# Altium PCB PCB2.PcbDoc (part 1 of 2)
Units mm, origin at the board's own origin, x right, y up, seen from the top; angles counter-clockwise.
Board outline 99.5 x 79.18 mm, 4 copper layers (Top Layer, Int1 (GND), Int2 (PWR), Bottom Layer), stack 1.317 mm thick; 113 components, 127 nets, 520 pads, 144 vias.
Unrouted connection lines stored in the file: 1.
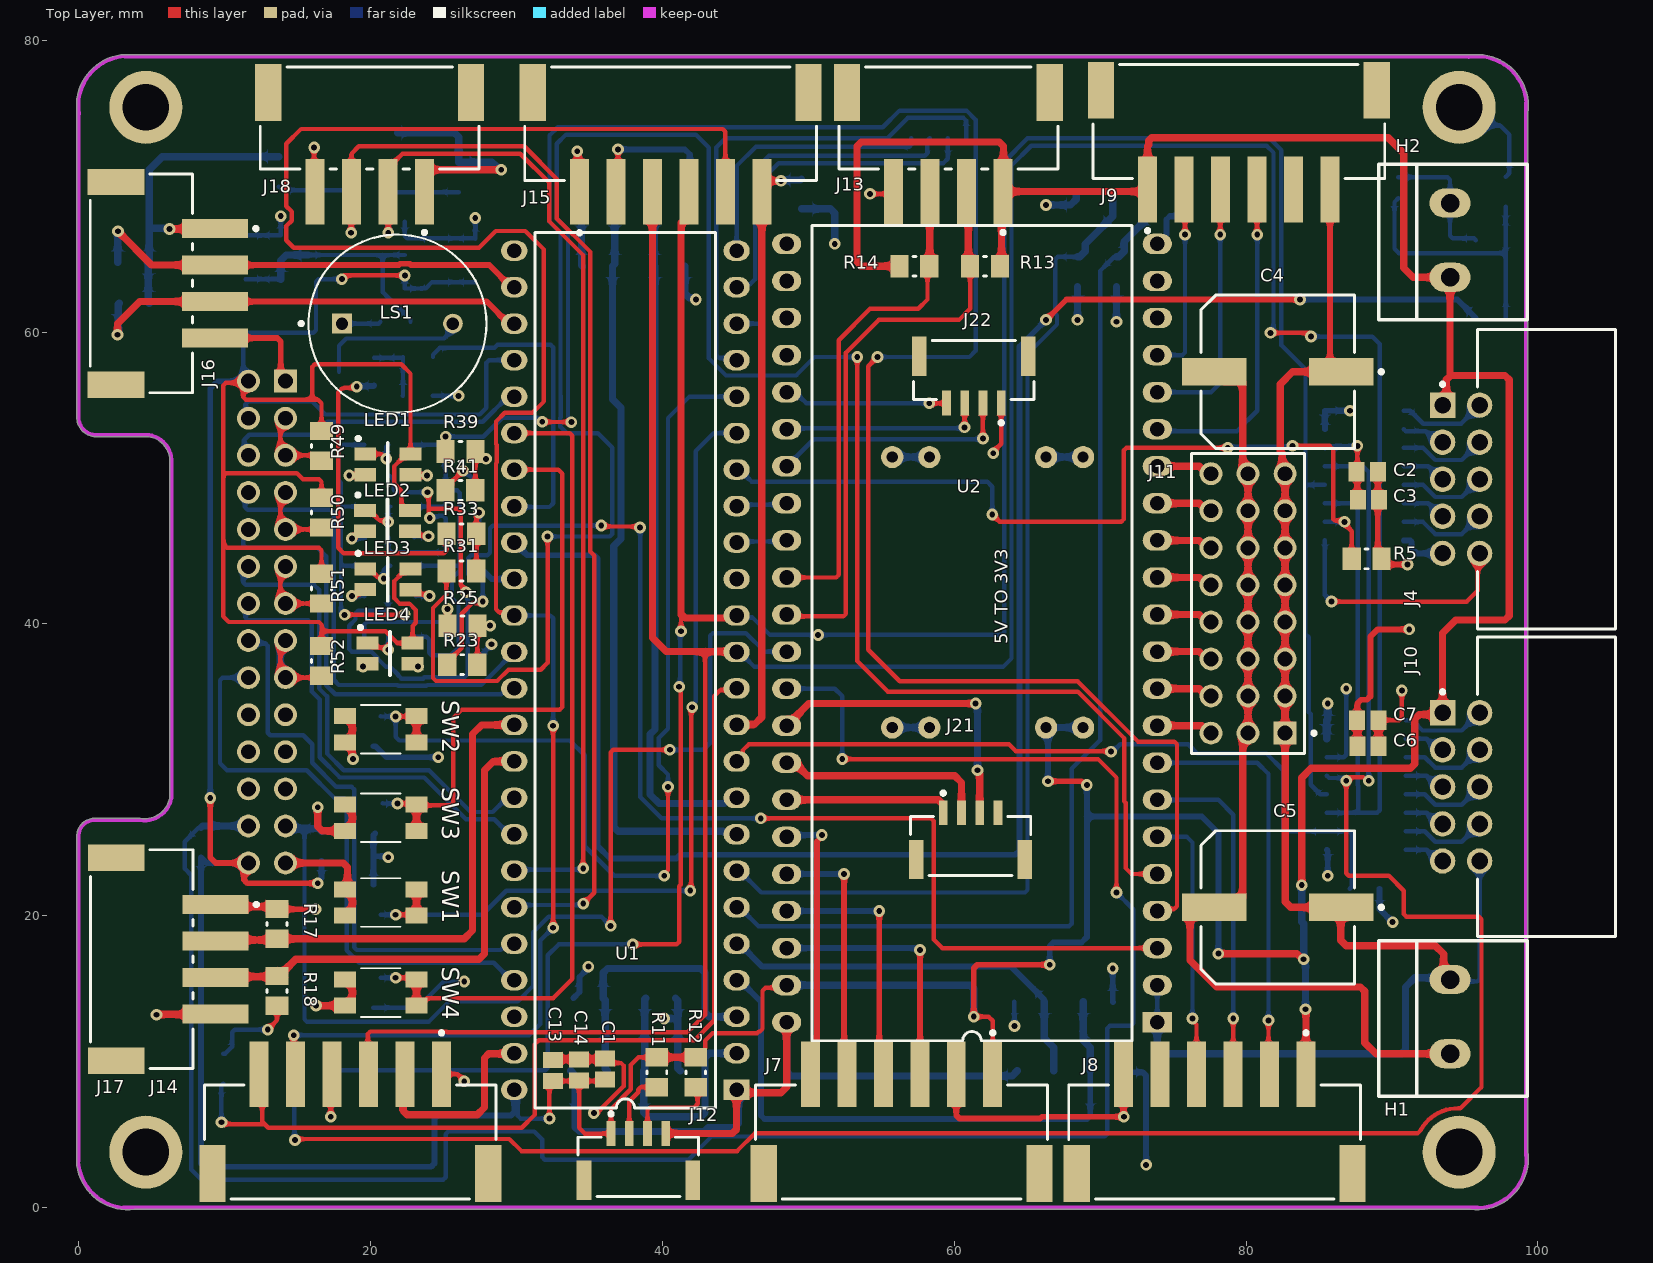
[diagram p0: Top Layer view]
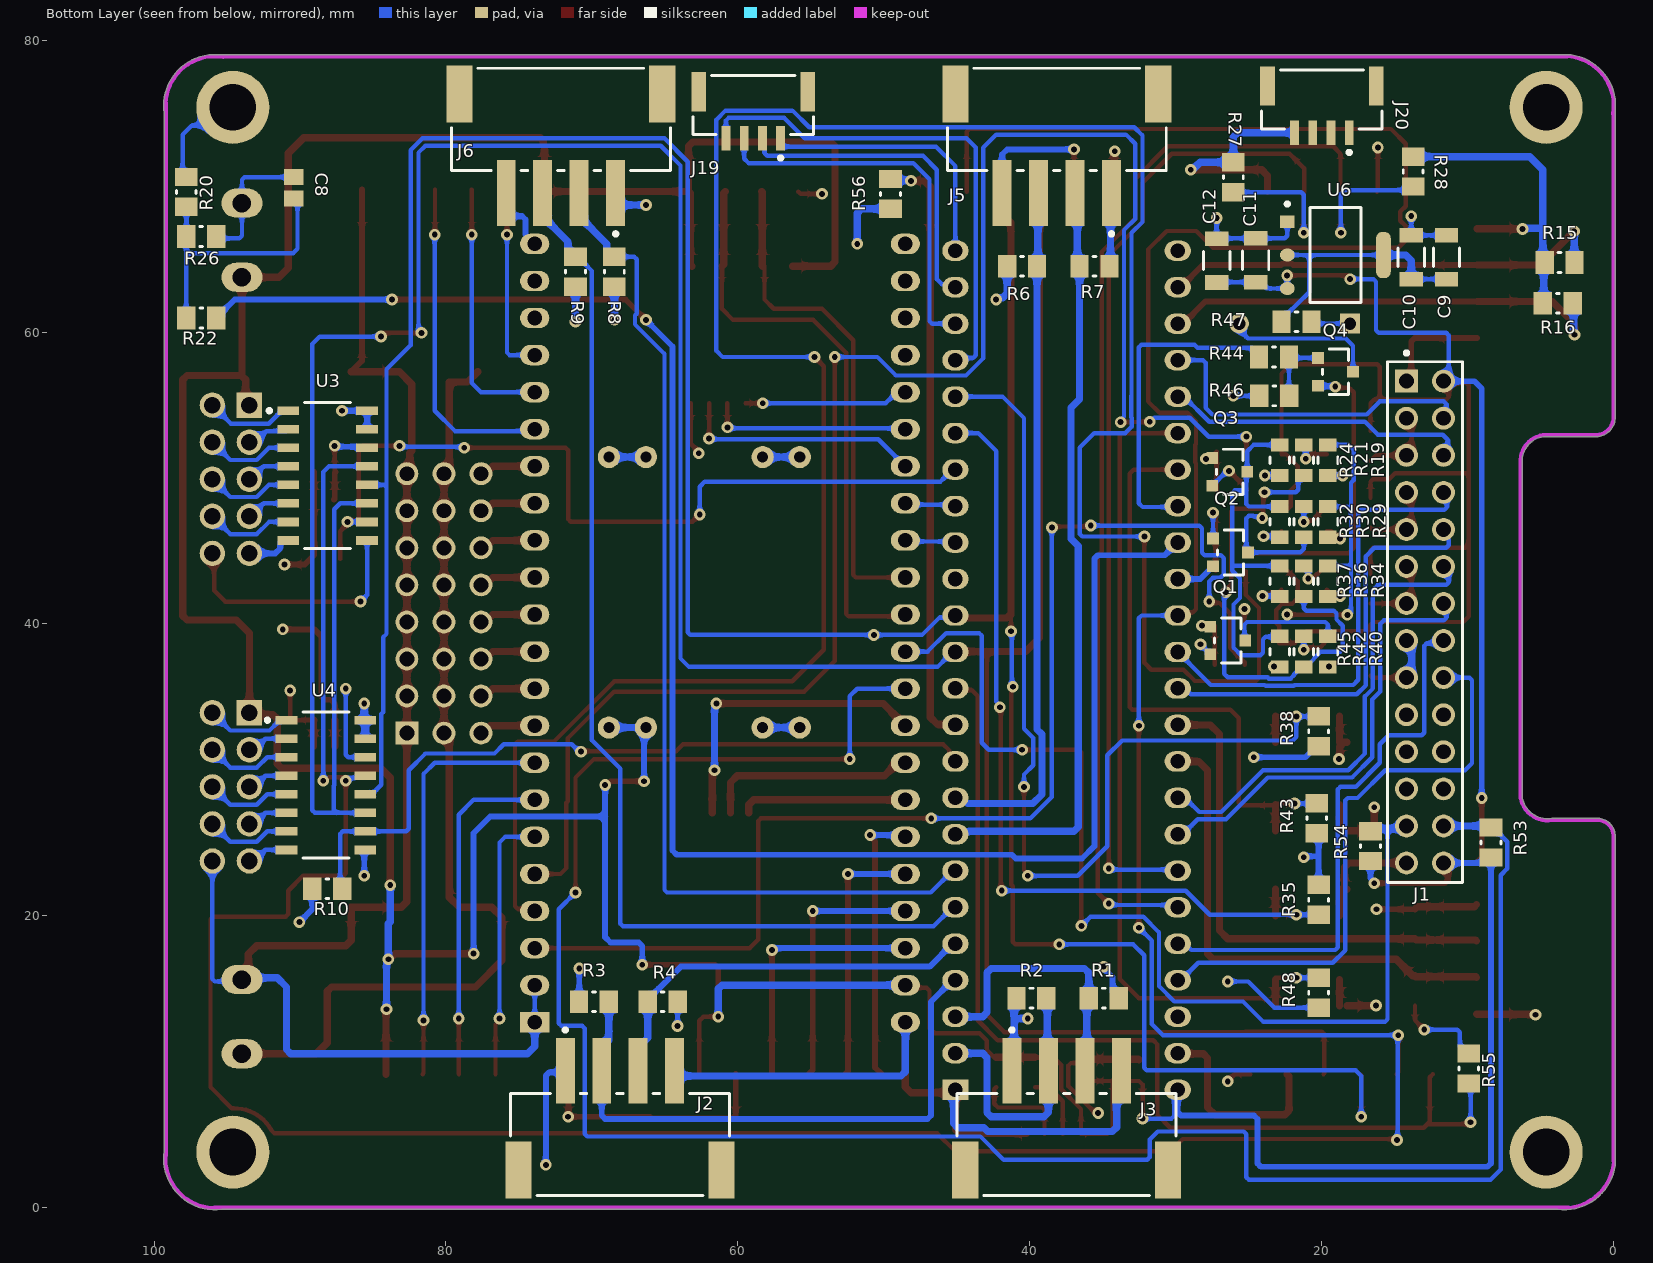
[diagram p1: Bottom Layer view, seen from below]
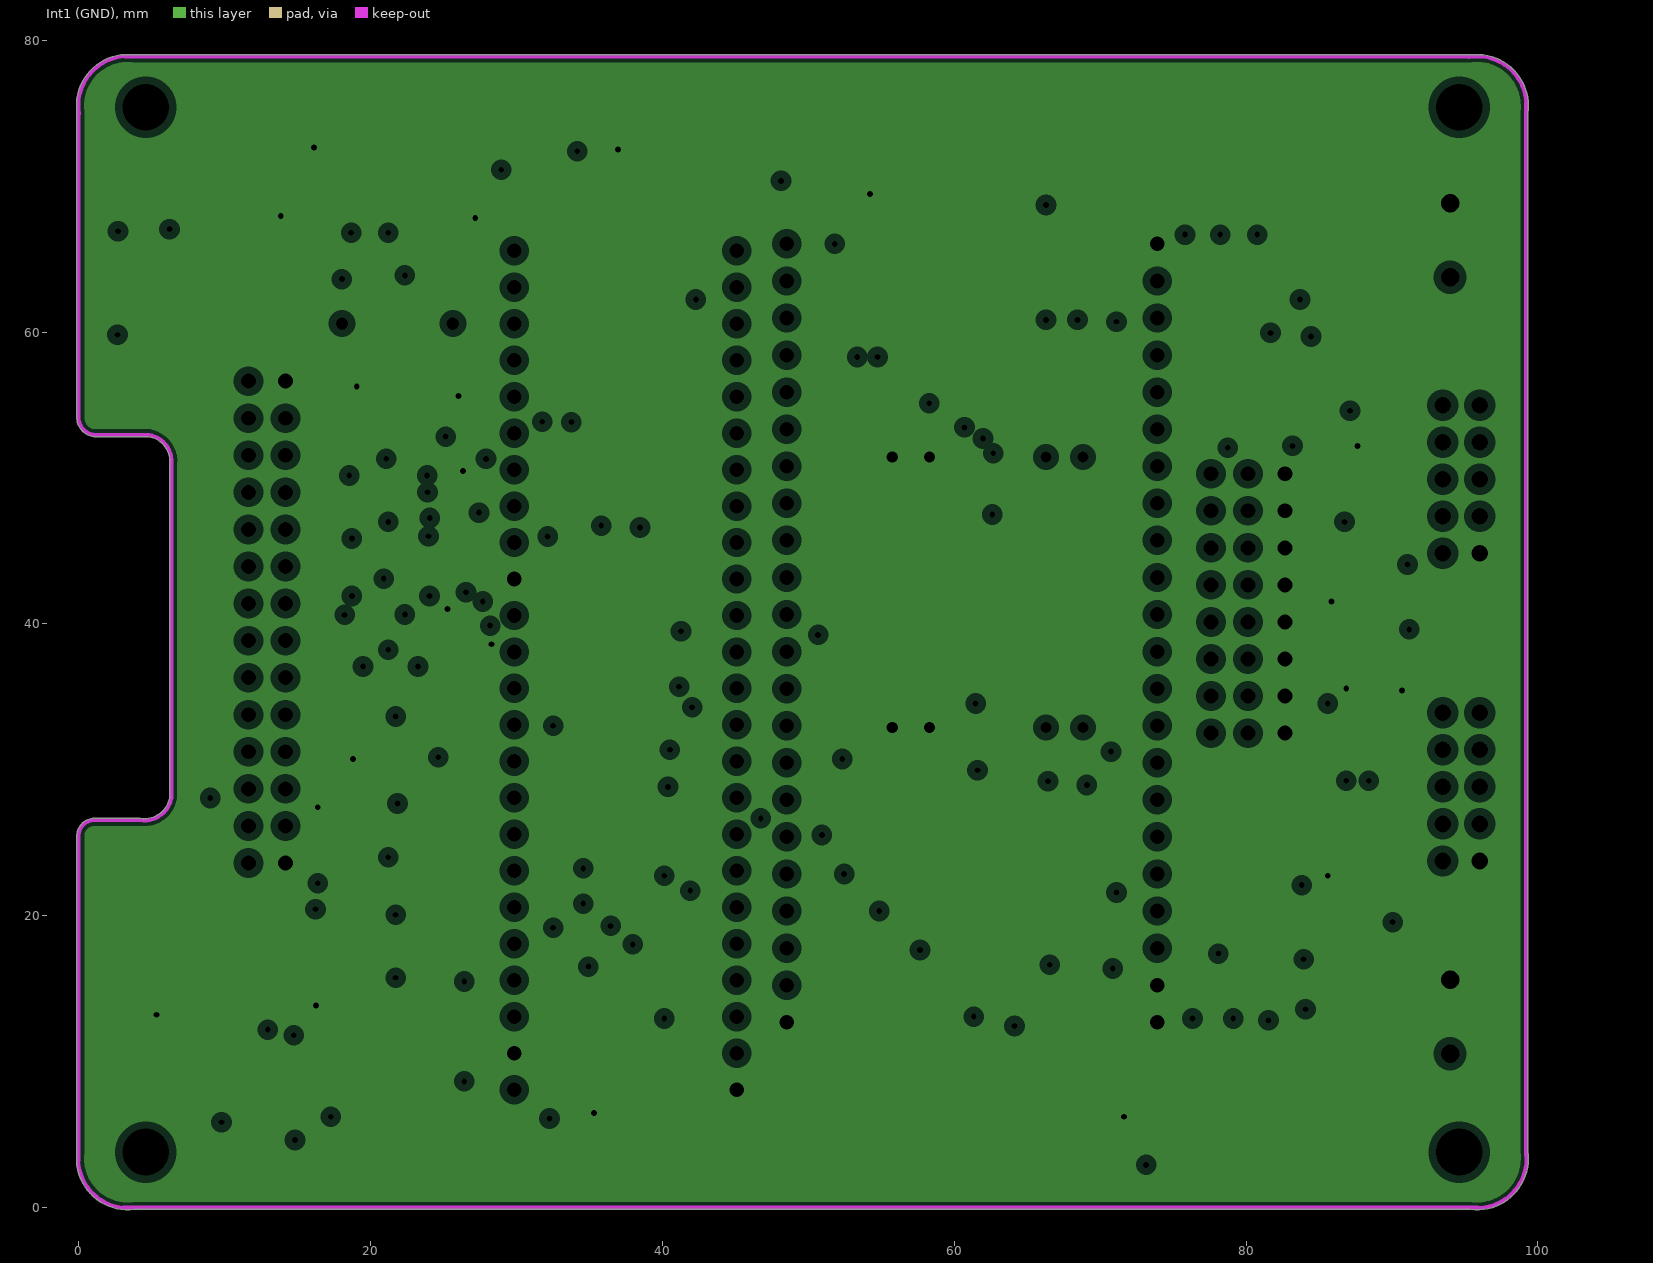
[diagram p2: Int1 (GND), clearances drawn from the general rule]
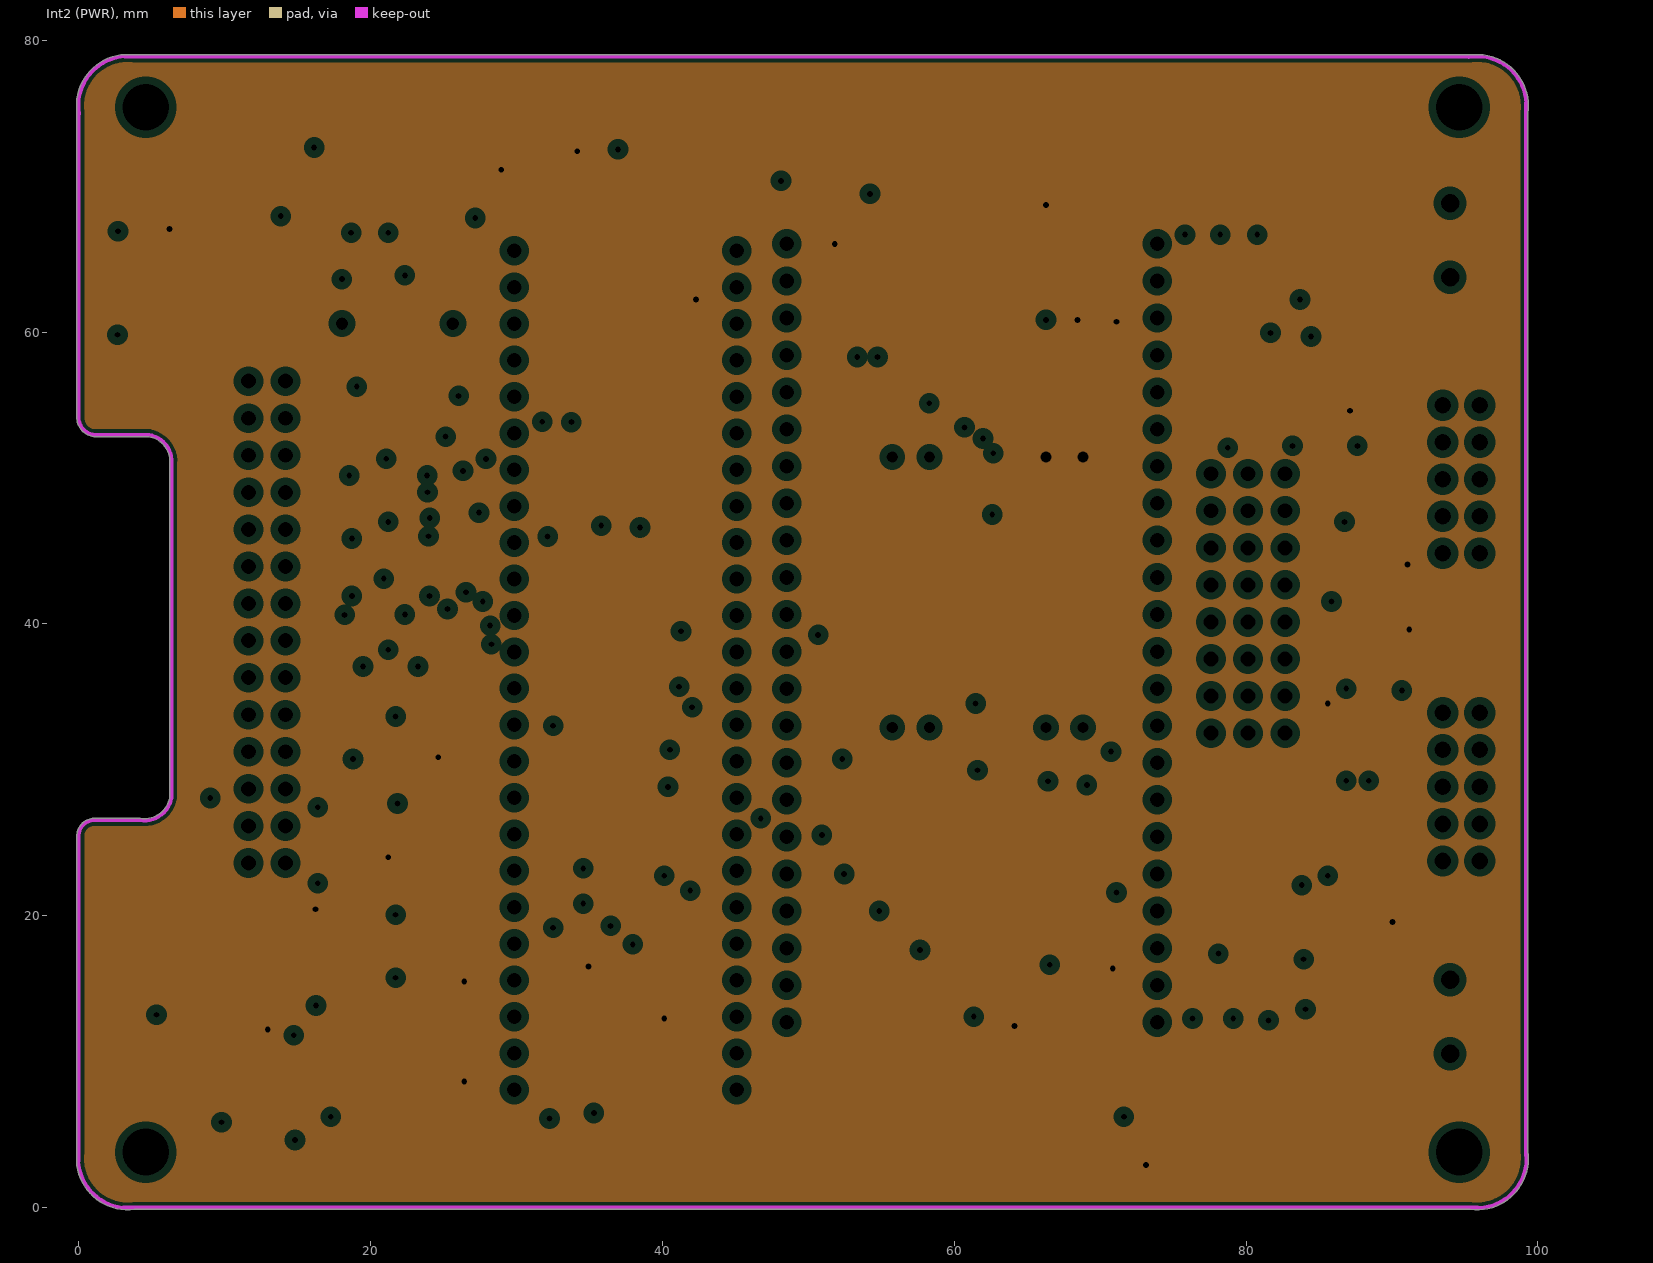
[diagram p3: Int2 (PWR), clearances drawn from the general rule]
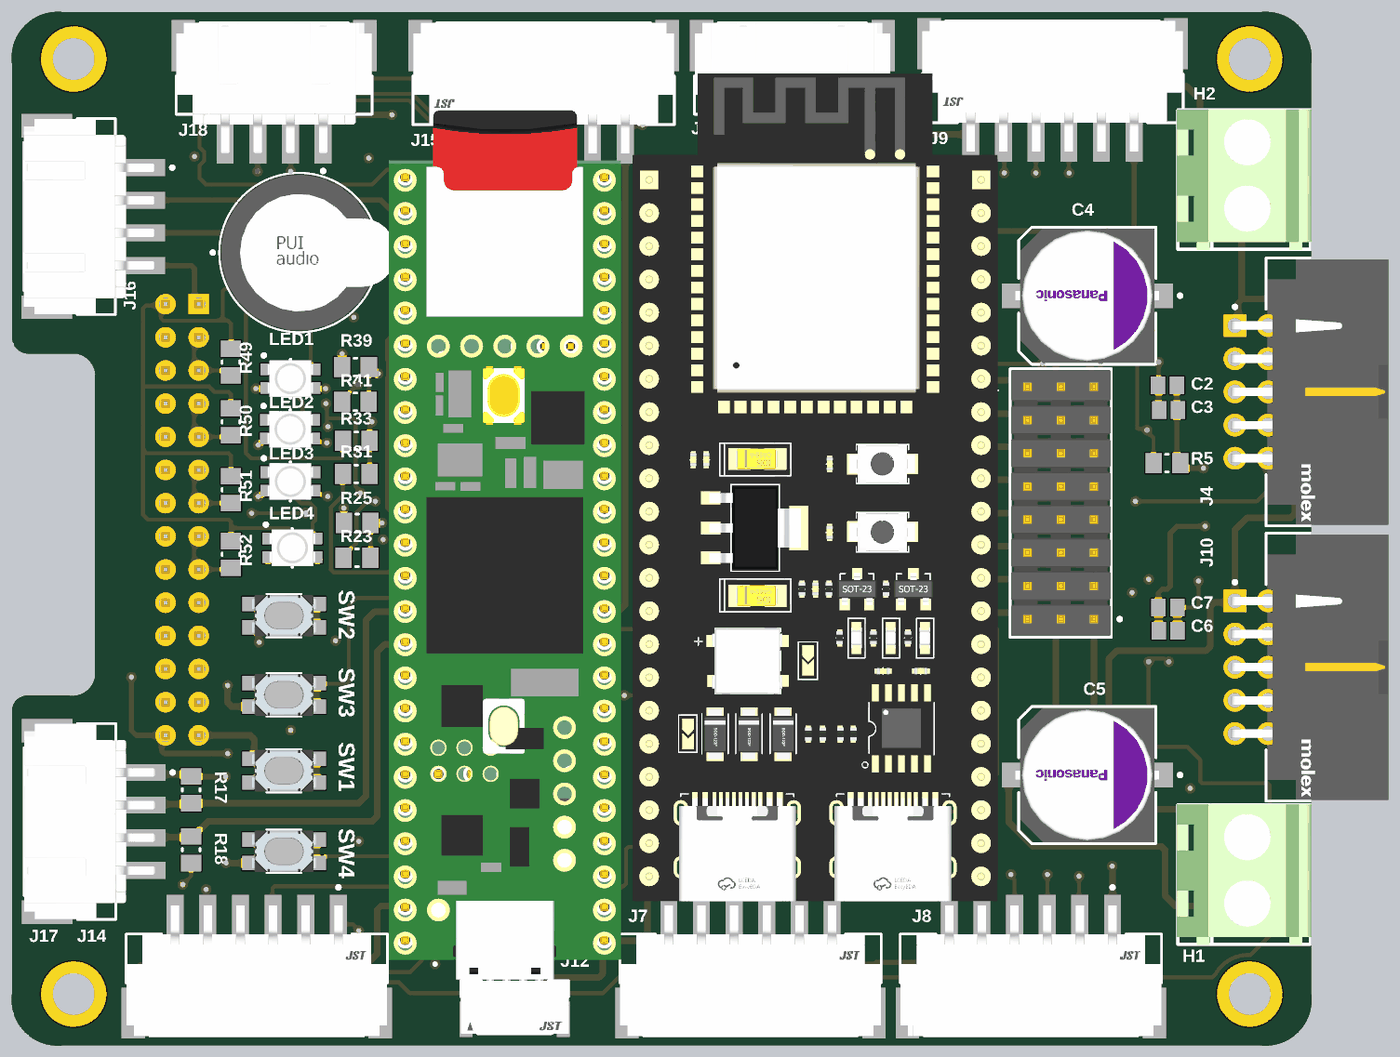
[diagram p5: 3D render of the assembled board from above, using the file's embedded part models]
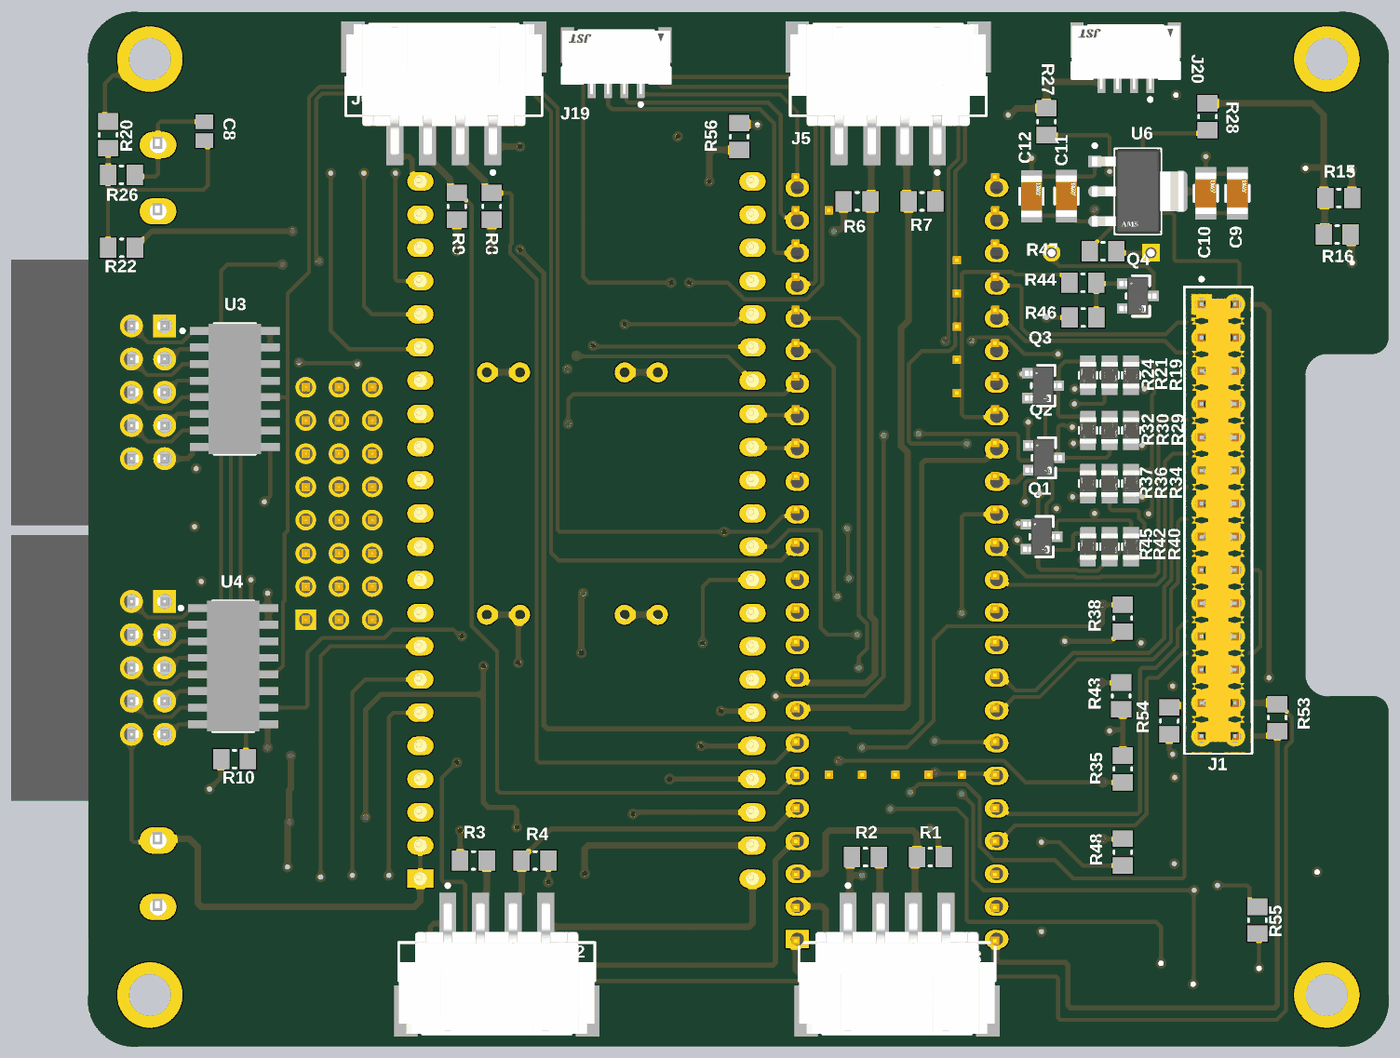
[diagram p6: 3D render of the assembled board from below, using the file's embedded part models]

## Layer stack, top to bottom
Top Solder: solder mask 0.0254, SM-001, Dk 4
Top Layer: signal copper 0.035
Dielectric 1: prepreg 0.1295, PP-017, Dk 4.3
Dielectric 2: prepreg 0.1295, PP-017, Dk 4.3
Int1 (GND): plane copper 0.009, net GND
Dielectric 3: core 0.7112, Core-039, Dk 4.8
Int2 (PWR): plane copper 0.009, net 3.3
Dielectric 4: prepreg 0.1295, PP-017, Dk 4.3
Dielectric 5: prepreg 0.1295, PP-017, Dk 4.3
Bottom Layer: signal copper 0.035
Bottom Solder: solder mask 0.0254, SM-001, Dk 4

## Board outline
-0.127,3.818 -0.127,25.527 -0.127,25.534 cw(c1.079,25.463) 1.147,26.67 4.191,26.67 4.213,26.668 ccw(c4.508,28.384) 6.223,28.078 6.223,51.181 6.245,51.252 ccw(c4.508,51.117) 4.815,52.832 1.143,52.832 1.14,52.832 cw(c1.175,54.134) -0.127,54.167 -0.127,75.049 cw(c3.365,75.501) 3.818,78.994 95.369,78.994 cw(c95.822,75.501) 99.344,75.501 cw(c95.822,75.501) 99.314,75.049 99.314,3.818 cw(c95.822,3.365) 99.344,3.365 cw(c95.822,3.365) 95.369,-0.127 3.818,-0.127 cw(c3.365,3.365)

## Design rules (kind name [scope] priority, off if disabled: settings)
Clearance [All] p1: gap=0.2 ignorepadtopadclearanceinfootprint=FALSE
PlaneClearance [All] p1: clearance=0.508
PlaneConnect [All] p1: planeconnectstyle=Relief reliefexpansion=0.508 reliefentries=4 reliefconductorwidth=0.254 reliefairgap=0.254
PolygonConnect [All] p1: connectstyle=Relief reliefconductorwidth=0.254 reliefentries=4 polygonreliefangle="90 Angle" airgapwidth=0.254
RoutingVias [All] p1: holewidth=0.5 width=1 viastyle="Through Hole" minholewidth=0.3 minwidth=0.6 maxholewidth=0.4 maxwidth=0.8
SolderMaskExpansion [All] p1: expansion=0.102 istentingtop=FALSE
Width POWER [All] p1: maxlimit=0.5 minlimit=0.3 preferedwidth=0.4
Width SIGNAL [InNetClass('SIGNAL')] p2: maxlimit=0.4 minlimit=0.2 preferedwidth=0.3 minimp=50.000000 maximp=50.000000 favimp=50.000000
Width [All] p3: maxlimit=0.254 minlimit=0.254 preferedwidth=0.254
28 further rules are at their usual default settings.

## Components (designator, comment, footprint, x,y, rotation, side; value= is the part's Value field where it differs from the comment)
"5V TO 3V3" "MP1584" MP1584 66.293,32.893 r90 top (schematic designator ?)
C1 "VJ0805Y104MXAMT" CAPC2013X145X48LL20T23 36.068,9.488 r270 top
C2 "VJ0805Y104MXAMT" CAPC2013X145X48LL20T23 88.302,50.419 r0 top
C3 "VJ0805Y104MXAMT" CAPC2013X145X48LL20T23 88.392,48.514 r0 top
C4 "100SXV15MX" FP-OS-CON-SMT-F8-MFG 82.169,57.277 r180 top
C5 "100SXV15MX" FP-OS-CON-SMT-F8-MFG 82.169,20.574 r180 top
C6 "VJ0805Y104MXAMT" CAPC2013X145X48LL20T23 88.355,31.623 r180 top
C7 "VJ0805Y104MXAMT" CAPC2013X145X48LL20T23 88.342,33.401 r180 top
C8 "VJ0805Y104MXAMT" CAPC2013X145X48LL20T23 90.424,69.887 r270 bottom
C9 "12061A101JAT2A" FP-1206-L_3_2_0_2-W_1_6_0-MFG 11.43,65.127 r90 bottom
C10 "12061A101JAT2A" FP-1206-L_3_2_0_2-W_1_6_0-MFG 13.843,65.127 r90 bottom
C11 "12061A101JAT2A" FP-1206-L_3_2_0_2-W_1_6_0-MFG 24.511,64.921 r90 bottom
C12 "12061A101JAT2A" FP-1206-L_3_2_0_2-W_1_6_0-MFG 27.178,64.897 r90 bottom
C13 "VJ0805Y104MXAMT" CAPC2013X145X48LL20T23 32.498,9.398 r270 top
C14 "VJ0805Y104MXAMT" CAPC2013X145X48LL20T23 34.29,9.435 r270 top
H1 "2P" KF128-2P 89.027,18.288 r270 top
H2 "2P" KF128-2P 89.027,71.501 r270 top
J1 "HTSW-114-17-L-D" FP-HTSW-114-17-L-D-MFG 12.9,40.123 r270 bottom
J2 "S4B-XH-SM4-TB(LF)(SN)" FP-S4B-XH-SM4-TB_LF_SN-MFG 68.072,4.318 r180 bottom
J3 "S4B-XH-SM4-TB(LF)(SN)" FP-S4B-XH-SM4-TB_LF_SN-MFG 37.465,4.318 r180 bottom
J4 "70247-1054" FP-70247-1054-MFG 100.584,49.911 r90 top
J5 "S4B-XH-SM4-TB(LF)(SN)" FP-S4B-XH-SM4-TB_LF_SN-MFG 38.135,74.577 r0 bottom
J6 "S4B-XH-SM4-TB(LF)(SN)" FP-S4B-XH-SM4-TB_LF_SN-MFG 72.117,74.577 r0 bottom
J7 "S6B-XH-SM4-TB(LF)(SN)" FP-S6B-XH-SM4-TB_LF_SN-MFG 56.388,4.494 r0 top
J8 "S6B-XH-SM4-TB(LF)(SN)" FP-S6B-XH-SM4-TB_LF_SN-MFG 77.851,4.494 r0 top
J9 "S6B-XH-SM4-TB(LF)(SN)" FP-S6B-XH-SM4-TB_LF_SN-MFG 79.502,74.422 r180 top
J10 "70247-1054" FP-70247-1054-MFG 100.584,28.829 r90 top
J11 "TSW-108-07-G-T" FP-TSW-108-07-G-T-MFG 80.137,41.402 r90 top
J12 "SM04B-GHS-TB(LF)(SN)" FP-SM04B-GHS-TB_LF_SN-MFG 38.354,2.794 r0 top
J13 "S4B-XH-SM4-TB(LF)(SN)" FP-S4B-XH-SM4-TB_LF_SN-MFG 59.598,74.676 r180 top
J14 "S6B-XH-SM4-TB(LF)(SN)" FP-S6B-XH-SM4-TB_LF_SN-MFG 18.609,4.494 r0 top
J15 "S6B-XH-SM4-TB(LF)(SN)" FP-S6B-XH-SM4-TB_LF_SN-MFG 40.565,74.276 r180 top
J16 "S4B-XH-SM4-TB(LF)(SN)" FP-S4B-XH-SM4-TB_LF_SN-MFG 4.29,63.338 r270 top
J17 "S4B-XH-SM4-TB(LF)(SN)" FP-S4B-XH-SM4-TB_LF_SN-MFG 4.318,17.018 r270 top
J18 "S4B-XH-SM4-TB(LF)(SN)" FP-S4B-XH-SM4-TB_LF_SN-MFG 19.939,74.676 r180 top
J19 "SM04B-GHS-TB(LF)(SN)" FP-SM04B-GHS-TB_LF_SN-MFG 58.938,75.554 r0 bottom
J20 "SM04B-GHS-TB(LF)(SN)" FP-SM04B-GHS-TB_LF_SN-MFG 19.969,75.935 r0 bottom
J21 "SM04B-GHS-TB(LF)(SN)" FP-SM04B-GHS-TB_LF_SN-MFG 61.117,24.776 r0 top
J22 "SM04B-GHS-TB(LF)(SN)" FP-SM04B-GHS-TB_LF_SN-MFG 61.341,57.404 r180 top
LED1 "150141M173100" "LED RGB 3528" 21.183,50.927 r0 top
LED2 "150141M173100" "LED RGB 3528" 21.161,47.054 r0 top
LED3 "150141M173100" "LED RGB 3528" 21.183,43.053 r0 top
LED4 "150141M173100" "LED RGB 3528" 21.336,37.973 r0 top
LS1 "AI-1223-TWT-3V-2-R" FP-AI-1223-TWT-3V-2-R-MFG 21.844,60.579 r0 top
Q1 "AO3400A" FP-SOT23-MFG 26.416,38.862 r180 bottom
Q2 "AO3400A" FP-SOT23-MFG 26.232,44.897 r180 bottom
Q3 "AO3400A" FP-SOT23-MFG 26.289,50.419 r180 bottom
Q4 "AO3400A" FP-SOT23-MFG 19.038,57.277 r180 bottom
R1 "CRCW08051K00FKTC" RESC2013X50X30ML20T20 34.916,14.351 r180 bottom
R2 "CRCW08051K00FKTC" RESC2013X50X30ML20T20 39.878,14.351 r0 bottom
R3 "CRCW08051K00FKTC" RESC2013X50X30ML20T20 69.859,14.097 r0 bottom
R4 "CRCW08051K00FKTC" RESC2013X50X30ML20T20 65.142,14.097 r180 bottom
R5 "CRCW08051K00FKTC" RESC2013X50X30ML20T20 88.265,44.45 r180 top
R6 "CRCW08051K00FKTC" RESC2013X50X30ML20T20 40.513,64.516 r0 bottom
R7 "CRCW08051K00FKTC" RESC2013X50X30ML20T20 35.551,64.516 r180 bottom
R8 "CRCW08051K00FKTC" RESC2013X50X30ML20T20 68.453,64.135 r270 bottom
R9 "CRCW08051K00FKTC" RESC2013X50X30ML20T20 71.12,64.135 r270 bottom
R10 "CRCW08051K00FKTC" RESC2013X50X30ML20T20 88.129,21.844 r180 bottom
R11 "CRCW08051K00FKTC" RESC2013X50X30ML20T20 39.624,9.271 r270 top
R12 "CRCW08051K00FKTC" RESC2013X50X30ML20T20 42.291,9.271 r270 top
R13 "CRCW08051K00FKTC" RESC2013X50X30ML20T20 62.112,64.516 r180 top
R14 "CRCW08051K00FKTC" RESC2013X50X30ML20T20 57.268,64.516 r0 top
R15 "CRCW08051K00FKTC" RESC2013X50X30ML20T20 3.674,64.77 r180 bottom
R16 "CRCW08051K00FKTC" RESC2013X50X30ML20T20 3.801,61.976 r180 bottom
R17 "CRCW08051K00FKTC" RESC2013X50X30ML20T20 13.589,19.44 r90 top
R18 "CRCW08051K00FKTC" RESC2013X50X30ML20T20 13.589,14.85 r90 top
R19 "RT0805FRE07330RL" FP-RT0805-MFG 19.558,51.215 r90 bottom value=330Ω
R20 "CRCW08051K00FKTC" RESC2013X50X30ML20T20 97.79,69.605 r90 bottom
R21 "RT0805FRE07330RL" FP-RT0805-MFG 21.209,51.215 r270 bottom value=330Ω
R22 "CRCW08051K00FKTC" RESC2013X50X30ML20T20 96.765,60.96 r0 bottom
R23 "CRCW08051K00FKTC" RESC2013X50X30ML20T20 26.28,37.211 r0 top
R24 "RT0805FRE07330RL" FP-RT0805-MFG 22.86,51.215 r90 bottom value=330Ω
R25 "CRCW08051K00FKTC" RESC2013X50X30ML20T20 26.298,39.878 r0 top
R26 "CRCW08051K00FKTC" RESC2013X50X30ML20T20 96.774,66.548 r0 bottom
R27 "CRCW08051K00FKTC" RESC2013X50X30ML20T20 26.035,70.612 r270 bottom
R28 "CRCW08051K00FKTC" RESC2013X50X30ML20T20 13.716,70.993 r270 bottom
R29 "RT0805FRE07330RL" FP-RT0805-MFG 19.558,46.99 r90 bottom value=330Ω
R30 "RT0805FRE07330RL" FP-RT0805-MFG 21.209,46.99 r270 bottom value=330Ω
R31 "CRCW08051K00FKTC" RESC2013X50X30ML20T20 26.223,43.627 r0 top
R32 "RT0805FRE07330RL" FP-RT0805-MFG 22.86,46.99 r90 bottom value=330Ω
R33 "CRCW08051K00FKTC" RESC2013X50X30ML20T20 26.223,46.167 r0 top
R34 "RT0805FRE07330RL" FP-RT0805-MFG 19.558,42.926 r90 bottom value=330Ω
R35 "CRCW08051K00FKTC" RESC2013X50X30ML20T20 20.193,21.091 r90 bottom
R36 "RT0805FRE07330RL" FP-RT0805-MFG 21.209,42.926 r270 bottom value=330Ω
R37 "RT0805FRE07330RL" FP-RT0805-MFG 22.86,42.926 r90 bottom value=330Ω
R38 "CRCW08051K00FKTC" RESC2013X50X30ML20T20 20.193,32.639 r90 bottom
R39 "CRCW08051K00FKTC" RESC2013X50X30ML20T20 26.162,51.816 r0 top
R40 "RT0805FRE07330RL" FP-RT0805-MFG 19.558,38.1 r90 bottom value=330Ω
R41 "CRCW08051K00FKTC" RESC2013X50X30ML20T20 26.153,49.149 r0 top
R42 "RT0805FRE07330RL" FP-RT0805-MFG 21.209,38.1 r270 bottom value=330Ω
R43 "CRCW08051K00FKTC" RESC2013X50X30ML20T20 20.32,26.679 r90 bottom
R44 "CRCW08051K00FKTC" RESC2013X50X30ML20T20 23.25,58.293 r180 bottom
R45 "RT0805FRE07330RL" FP-RT0805-MFG 22.86,38.1 r90 bottom value=330Ω
R46 "CRCW08051K00FKTC" RESC2013X50X30ML20T20 23.232,55.626 r180 bottom
R47 "CRCW08051K00FKTC" RESC2013X50X30ML20T20 21.708,60.706 r0 bottom
R48 "CRCW08051K00FKTC" RESC2013X50X30ML20T20 20.193,14.723 r90 bottom
R49 "CRCW08051K00FKTC" RESC2013X50X30ML20T20 16.637,52.197 r90 top
R50 "CRCW08051K00FKTC" RESC2013X50X30ML20T20 16.637,47.625 r90 top
R51 "CRCW08051K00FKTC" RESC2013X50X30ML20T20 16.637,42.418 r90 top
R52 "CRCW08051K00FKTC" RESC2013X50X30ML20T20 16.637,37.465 r90 top
R53 "CRCW08051K00FKTC" RESC2013X50X30ML20T20 8.382,25.022 r270 bottom
R54 "CRCW08051K00FKTC" RESC2013X50X30ML20T20 16.637,24.765 r270 bottom
R55 "CRCW08051K00FKTC" RESC2013X50X30ML20T20 9.906,9.525 r270 bottom
R56 "CRCW08051K00FKTC" RESC2013X50X30ML20T20 49.53,69.469 r90 bottom
SW1 "434130025852" 434130025852 20.697,20.905 r180 top
SW2 "434130025852" 434130025852 20.697,32.777 r180 top
SW3 "434130025852" 434130025852 20.697,26.714 r180 top
SW4 "434130025852" 434130025852 20.697,14.732 r180 top
U1 "Teensy 4.1" "Teensy 4.1" 45.085,8.074 r180 top
U2 "ESP32_N8R8" DIP44 73.914,12.7 r180 top
U3 "MCP3008T-I/SL" FP-C04-108-MFG 88.105,50.165 r180 bottom
U4 "MCP3008T-I/SL" FP-C04-108-MFG 88.232,28.956 r180 bottom
U6 "ams1117" FP-ams1117-IPC_C 19.043,65.278 r180 bottom

## Footprints (in the part's own frame and the unit in brackets; to place one, negate y for a bottom-side part, rotate by r counter-clockwise, add the part's x,y. Pads: shape width x height; smd on the part's side, far side on the other; paste and mask are expansions set on the pad)
434130025852 [mm] "Tact Switch, body 4.90 x 3.20 mm"
  rect 1.5x1.1 smd: A1(-2.45,0.9) A2(-2.45,-0.9) B1(2.45,0.9) B2(2.45,-0.9)
  silkscreen extent -1.35,-1.66 1.35,1.66, body extent -2.45,-1.6 2.45,1.6, height 2.5
CAPC2013X145X48LL20T23 [mm] "Chip Capacitor, 2-Leads, Body 2.00x1.25mm, IPC High Density"
  rect 1.1x1.35 smd: 1(-0.725,0) 2(0.725,0)
  body extent -1.1,-0.72 1.1,0.72, height 1.45
DIP44 [mm]
  rect 2x1.4 hole 1: 1(0,0)
  oval 2x1.4 hole 1: 2(0,-2.54) 3(0,-5.08) 4(0,-7.62) 5(0,-10.16) 6(0,-12.7) 7(0,-15.24) 8(0,-17.78) 9(0,-20.32) 10(0,-22.86) 11(0,-25.4) 12(0,-27.94) 13(0,-30.48) 14(0,-33.02) 15(0,-35.56) 16(0,-38.1) 17(0,-40.64) 18(0,-43.18) 19(0,-45.72) 20(0,-48.26) 21(0,-50.8) 22(0,-53.34) 23(25.4,-53.34) 24(25.4,-50.8) 25(25.4,-48.26) 26(25.4,-45.72) 27(25.4,-43.18) 28(25.4,-40.64) 29(25.4,-38.1) 30(25.4,-35.56) 31(25.4,-33.02) 32(25.4,-30.48) 33(25.4,-27.94) 34(25.4,-25.4) 35(25.4,-22.86) 36(25.4,-20.32) 37(25.4,-17.78) 38(25.4,-15.24) 39(25.4,-12.7) 40(25.4,-10.16) 41(25.4,-7.62) 42(25.4,-5.08) 43(25.4,-2.54) 44(25.4,0)
  silkscreen extent 1.73,-54.61 23.66,1.27, body extent -1.4,-61.59 26.54,1.8, height 11.25
FP-1206-L_3_2_0_2-W_1_6_0-MFG [mm]
  rect 1x1.6 smd paste+0 mask+0: 1(-1.5,0) 2(1.5,0)
  silkscreen extent -0.63,-0.9 0.63,0.9, body extent -1.6,-0.8 1.6,0.8, height 0.94
FP-70247-1054-MFG [mm]
  rect 1.74x1.74 hole 1.14 paste-2539.97 mask+0: 1(5.08,7.115)
  round 1.74 hole 1.14 paste-2539.97 mask+0: 2(5.08,4.575) 3(2.54,7.115) 4(2.54,4.575) 5(0,7.115) 6(0,4.575) 7(-2.54,7.115) 8(-2.54,4.575) 9(-5.08,7.115) 10(-5.08,4.575)
  silkscreen extent -10.26,-4.74 10.26,7.24, body extent -10.36,-4.83 10.36,8.09, height 0.25
FP-AI-1223-TWT-3V-2-R-MFG [mm]
  rect 1.35x1.35 hole 0.85 paste-2539.97 mask+0: 1(-3.8,0)
  round 1.35 hole 0.85 paste-2539.97 mask+0: 2(3.8,0)
  silkscreen extent -6.72,-6.1 6.1,6.1, body extent -6.2,-6.2 6.2,6.2, height 0.25
FP-ams1117-IPC_C [mm]
  rect 1.004x0.872 smd paste+0 mask+0: 1(-3.295,2.29)
  rrect100% 1.004x0.872 smd paste+0 mask+0: 2(-3.295,0) 3(-3.295,-2.29)
  rrect87% 1.004x3.182 smd paste+0 mask+0: 4(3.295,0)
  silkscreen extent -3.42,-3.25 1.75,3.62, body extent -3.5,-3.25 3.5,3.25, height 1.8
FP-C04-108-MFG [mm]
  rect 1.5x0.6 smd paste+0 mask+0: 1(-2.7,4.445) 2(-2.7,3.175) 3(-2.7,1.905) 4(-2.7,0.635) 5(-2.7,-0.635) 6(-2.7,-1.905) 7(-2.7,-3.175) 8(-2.7,-4.445) 9(2.7,-4.445) 10(2.7,-3.175) 11(2.7,-1.905) 12(2.7,-0.635) 13(2.7,0.635) 14(2.7,1.905) 15(2.7,3.175) 16(2.7,4.445)
  silkscreen extent -4.12,-5 1.58,5, body extent -2,-5 2,5, height 1.75
FP-HTSW-114-17-L-D-MFG [mm]
  rect 1.57x1.57 hole 1.02 paste-2539.97 mask+0: 1(-16.51,-1.27)
  round 1.57 hole 1.02 paste-2539.97 mask+0: 2(-16.51,1.27) 3(-13.97,-1.27) 4(-13.97,1.27) 5(-11.43,-1.27) 6(-11.43,1.27) 7(-8.89,-1.27) 8(-8.89,1.27) 9(-6.35,-1.27) 10(-6.35,1.27) 11(-3.81,-1.27) 12(-3.81,1.27) 13(-1.27,-1.27) 14(-1.27,1.27) 15(1.27,-1.27) 16(1.27,1.27) 17(3.81,-1.27) 18(3.81,1.27) 19(6.35,-1.27) 20(6.35,1.27) 21(8.89,-1.27) 22(8.89,1.27) 23(11.43,-1.27) 24(11.43,1.27) 25(13.97,-1.27) 26(13.97,1.27) 27(16.51,-1.27) 28(16.51,1.27)
  silkscreen extent -18.57,-2.58 17.84,2.58, body extent -17.78,-2.51 17.78,2.51, height 18.29
FP-OS-CON-SMT-F8-MFG [mm]
  rect 4.4x1.9 smd paste+0 mask+0: 1(-4.35,0) 2(4.35,0)
  silkscreen extent -7.23,-5.25 5.25,5.25, body extent -6.8,-5.5 6.8,5.5, height 0.25
FP-RT0805-MFG [mm]
  rect 0.9x1.2 smd paste+0 mask+0: 1(-1.05,0) 2(1.05,0)
  silkscreen extent -0.22,-0.67 0.22,0.67, body extent -1,-0.63 1,0.63, height 0.6
FP-S4B-XH-SM4-TB_LF_SN-MFG [mm]
  rect 1.3x4.5 smd paste+0 mask+0: 1(-3.75,5.05) 2(-1.25,5.05) 3(1.25,5.05) 4(3.75,5.05)
  rect 1.8x3.9 smd paste+0 mask+0: 5(-6.95,-1.75) 6(6.95,-1.75)
  silkscreen extent -7.5,-3.5 7.5,7.97, body extent -7.47,-3.5 7.47,6.5, height 6
FP-S6B-XH-SM4-TB_LF_SN-MFG [mm]
  rect 1.3x4.5 smd paste+0 mask+0: 1(6.25,4.65) 2(3.75,4.65) 3(1.25,4.65) 4(-1.25,4.65) 5(-3.75,4.65) 6(-6.25,4.65)
  rect 1.8x3.9 smd paste+0 mask+0: 7(-9.45,-2.15) 8(9.45,-2.15)
  silkscreen extent -10,-3.9 10,7.6, body extent -10.45,-4.2 10.45,7, height 0.25
FP-SM04B-GHS-TB_LF_SN-MFG [mm]
  rect 0.6x1.7 smd paste+0 mask+0: 1(-1.875,2.275) 2(-0.625,2.275) 3(0.625,2.275) 4(1.875,2.275)
  rect 1x2.7 smd paste+0 mask+0: 5(-3.725,-0.925) 6(3.725,-0.925)
  silkscreen extent -4.13,-2.02 4.13,3.75, body extent -4.33,-2.37 4.33,3.22, height 0.25
FP-SOT23-MFG [mm]
  rect 0.8x0.8 smd paste+0 mask+0: 1(-1.2,0.95) 2(-1.2,-0.95) 3(1.2,0)
  silkscreen extent -0.9,-1.55 0.9,1.55, body extent -1.41,-1.45 1.41,1.45, height 1.25
FP-TSW-108-07-G-T-MFG [mm]
  rect 1.57x1.57 hole 1.02 paste-2539.97 mask+0: 1(-8.89,-2.54)
  round 1.57 hole 1.02 paste-2539.97 mask+0: 2(-8.89,0) 3(-8.89,2.54) 4(-6.35,-2.54) 5(-6.35,0) 6(-6.35,2.54) 7(-3.81,-2.54) 8(-3.81,0) 9(-3.81,2.54) 10(-1.27,-2.54) 11(-1.27,0) 12(-1.27,2.54) 13(1.27,-2.54) 14(1.27,0) 15(1.27,2.54) 16(3.81,-2.54) 17(3.81,0) 18(3.81,2.54) 19(6.35,-2.54) 20(6.35,0) 21(6.35,2.54) 22(8.89,-2.54) 23(8.89,0) 24(8.89,2.54)
  silkscreen extent -10.29,-4.64 10.29,3.88, body extent -10.39,-3.98 10.39,3.98, height 0.25
KF128-2P [mm]
  oval 2x2.8 hole 1.27: 1(2.667,4.953) 2(7.747,4.953)
  silkscreen extent 0,0.08 10.67,10.24, body extent -0.05,0 10.71,10.3, height 14.59
"LED RGB 3528" [mm] "Chip LED, 4-Leads, Body 2.8x3.5mm (max), Pitch 1.42mm, IPC Medium Density"
  rect 1.5x0.9 smd: 1(1.55,0.707) 2(1.55,-0.71) 3(-1.55,0.707) 4(-1.55,-0.707)
  silkscreen extent -2.15,-1.5 0.02,1.9, body extent -1.75,-1.4 1.75,1.4, height 1.87
MP1584 [mil]
  round 60 hole 30: 1(0,0) 1(0,-100) 2(0,414.96) 2(0,314.96) 3(729.92,314.96) 3(729.92,414.96) 4(729.92,-100) 4(729.92,0)
  body extent -65,-171 805,491, height 161
RESC2013X50X30ML20T20 [mm] "Chip Resistor, 2-Leads, Body 2.00x1.25mm, IPC Low Density"
  rect 1.25x1.55 smd: 1(-1.025,0) 2(1.025,0)
  silkscreen extent -0.1,-0.67 0.1,0.67, body extent -1.1,-0.72 1.1,0.72, height 0.5
"Teensy 4.1" [mm]
  rect 1.8x1.4 hole 1: 1(0,0)
  oval 1.8x1.4 hole 1: 2(0,-2.5) 3(0,-5) 4(0,-7.5) 5(0,-10) 6(0,-12.5) 7(0,-15) 8(0,-17.5) 9(0,-20) 10(0,-22.5) 11(0,-25) 12(0,-27.5) 13(0,-30) 14(0,-32.5) 15(0,-35) 16(0,-37.5) 17(0,-40) 18(0,-42.5) 19(0,-45) 20(0,-47.5) 21(0,-50) 22(0,-52.5) 23(0,-55) 24(0,-57.5) 25(15.24,-57.5) 26(15.24,-55) 27(15.24,-52.5) 28(15.24,-50) 29(15.24,-47.5) 30(15.24,-45) 31(15.24,-42.5) 32(15.24,-40) 33(15.24,-37.5) 34(15.24,-35) 35(15.24,-32.5) 36(15.24,-30) 37(15.24,-27.5) 38(15.24,-25) 39(15.24,-22.5) 40(15.24,-20) 41(15.24,-17.5) 42(15.24,-15) 43(15.24,-12.5) 44(15.24,-10) 45(15.24,-7.5) 46(15.24,-5) 47(15.24,-2.5) 48(15.24,0)
  silkscreen extent 1.43,-58.75 13.81,1.25, body extent -1.4,-63.41 16.38,3.15, height 12.31

## Part data
C1 C2 C3 C6 C7 C8 C13 C14: library part CMP-2007-01796-1, Manufacturer=Vitramon, Part Number=VJ0805Y104MXAMT
C4 C5: library part CMP-05428-000606-1, "Conductive Polymer Aluminum Solid Capacitors (OS-CON) 15uF ±20% 100V RADIAL SMT 10x7.9mm", Capacitance=15uF, Case/Package=Radial, ESR (Equivalent Series Resistance)=60mR, Max Operating Temperature=125°C, Min Operating Temperature=-55°C, Tolerance=20%, Voltage Rating=100V, Life (Hours)=1000Hour, Mount="Surface Mount", Packaging="Cut Tape", Series="OS-CON™, SXV"
C9 C10 C11 C12: library part CMP-04427-007664-1, "General Purpose Ceramic Capacitor, 1206, 100pF, 5%, NP0, 30ppm/°C, 100V", Capacitance=100pF, Case Code (Imperial)=1206, Case Code (Metric)=3216, Dielectric=C0G, Insulation Resistance=100GR, Max Operating Temperature=125°C, Min Operating Temperature=-55°C, Package Quantity=1, Temperature Coefficient=30ppm/°C, Tolerance=5%, Voltage=63V, Voltage Rating=100V, Case/Package=1206, Construction=Flat, Contact Plating=Tin, Depth=1.6mm, Height=0.94mm, Lead Free="Lead Free", Length=3.2mm, Mount="Surface Mount", Number of Pins=2, Packaging="Tape and Reel", Radiation Hardening=No, REACH SVHC="No SVHC", RoHS Compliant=Yes, Series=-, Termination=SMD/SMT, Thickness=0.037inch, Voltage Rating (DC)=100V, Width=0.063inch
H1 H2: library part KF-128-2P, "DOMINO 5.08MM"
J1: library part CMP-02766-000075-1, "CONN HEADER VERT 28POS 2.54MM", Current Rating=4.6A, Manufacturer=Samtec, Package=0, Temperature="-55°C to +125°C", Temperature Range High=+125°C, Temperature Range Low=-55°C, Voltage Rating=450V, Automotive=No, Category=Conn, ComponentLink2Description=Datasheet, ComponentLink2URL=http://suddendocs.samtec.com/prints/htsw-xxx-xx-xxx-x-xx-xx-xx-mkt.pdf, Conn Gender=Male, Conn Orientation=Vertical, Contact Material=Gold,Nickel, Device Class L1=Connectors, Device Class L2="Headers and Wire Housings", Device Class L3=unset, Digikey Description="CONN HEADER VERT 28POS 2.54MM", Footprint Url=http://suddendocs.samtec.com/prints/htsw-xxx-xx-xxx-x-xx-xx-xx-footprint.pdf, Height=18.62mm, Lead Free=Yes, Manufacturer Part Number=HTSW-114-17-L-D, Number of Contacts=28, Number of Rows=2, Octopart=https://octopart.com/htsw-114-17-l-d-samtec-10679119, Pitch=2.54mm, RoHS=TRUE
J2 J3 J5 J6 J13 J16 J17 J18: library part CMP-17439-000072-1, "CONN HEADER SMD R/A 4POS 2.5MM", Color=Natural, Contact Resistance=20mR, Housing Color=Beige, Max Current Rating=3A, Max Operating Temperature=85°C, Max Voltage Rating (AC)=250V, Min Operating Temperature=-25°C, Package Quantity=1, Connector Type="Male Pin", Contact Material="Copper Alloy", Contact Plating=Tin, Contact Type="Male Pin", Depth=10mm, Gender=Male, Housing Material=Polyamide, Lead Free="Lead Free", Length=15mm, Mount="Surface Mount", Number of Contacts=4, Number of Positions=4, Number of Rows=1, Orientation="Right Angle", Packaging="Tape and Reel", Pitch=0.098inch, REACH SVHC="No SVHC", Series=XH, Termination=Solder
J4 J10: library part CMP-00257-07673580-1, "70247-1054 Conn Shrouded Header (4 Sides) HDR 10 POS 2.54mm Solder RA Side Entry Thru-Hole C-Grid Tray", Current Rating=2.5A, Flammability Rating="UL94 V-0", Manufacturer Lifecycle Status=ACTIVE, Max Operating Temperature=120°C, Max Voltage Rating (DC)=250V, Min Operating Temperature=-55°C, Connector Type=Header, Contact Gender=Male, Contact Material=Gold, Contact Plating=Gold, Country of Origin=SK, ELV=Compliant, Gender=Male, Glow Wire Compliant=Non-compliant, Height=9.09mm, Housing Material=Polyester, Lead Length=3.05mm, Lifecycle Status=Production, Material=Polyester, Mating Post Length=6.1mm, Mount="Through Hole", NexarPartId=7673580, Number of Circuits=10, Number of Contacts=10, Number of Positions=10, Number of Rows=2, Orientation="Right Angle", Pitch=2.54mm, Plating=Tin, Radiation Hardening=No, REACH SVHC=Unknown, RoHS=Compliant, Row Spacing=2.54mm, Termination="Through Hole", Voltage Rating=250V, Voltage Rating (DC)=250V
J7 J8 J9 J14 J15: library part CMP-17439-000164-1, "CONN HEADER SMD R/A 6POS 2.5MM", Color=Natural, Contact Resistance=20mR, Flammability Rating="UL94 V-0", Housing Color=Beige, Max Current Rating=3A, Max Operating Temperature=85°C, Max Voltage Rating (AC)=250V, Min Operating Temperature=-25°C, Package Quantity=1, Connector Type=Header, Contact Finish - Mating=TIN, Contact Material="Copper Alloy", Contact Plating=Copper, Contact Shape=Square, Contact Type="Male Pin", Depth=7mm, Fastening Type=Detent, Gender=Male, Housing Material=Polyamide, Insulation Color=Natural, Insulation Material=Nylon, Lead Free="Lead Free", Length=20mm, Mount="Surface Mount", Number of Contacts=6, Number of Positions=6, Number of Rows=1, Orientation="Right Angle", Packaging="Tape and Reel", Pitch=2.5mm, REACH SVHC="No SVHC", Series=XH, Termination=Solder, Voltage Rating=250V
J11: library part CMP-02766-000095-1, "CONN HEADER VERT 24POS 2.54MM", Color=Black, Max Current Rating=7.6A, Max Operating Temperature=125°C, Max Voltage Rating (AC)=550V, Min Operating Temperature=-55°C, Package Quantity=1, Connector Type="Male Pin", Contact Material=Bronze, Contact Mating Length=0.23inch, Contact Plating=Gold, Depth=7.62mm, Gender=Male, Housing Color=Black, Housing Material=Polyester, Lead Free="Lead Free", Length=20.32mm, Mount="Through Hole", Number of Contacts=24, Number of Positions=24, Number of Rows=3, Orientation=Straight, Packaging=Rail/Tube, Pitch=2.54mm, Radiation Hardening=No, REACH SVHC="No SVHC", Row Spacing=0.1inch, Termination=Solder
J12 J19 J20 J21 J22: library part CMP-17439-000411-1, "CONN HEADER SMD R/A 4POS 1.25MM", Current Rating=1A, Housing Color=Natural, Voltage Rating=50V, Contact Material=Bronze, Contact Plating=Tin, Housing Material=Nylon, Lead Free="Lead Free", Mount="Surface Mount", Number of Contacts=4, Number of Positions=4, Number of Rows=1, Orientation="Right Angle", Packaging="Cut Tape", Pitch=1.25mm, REACH SVHC="No SVHC", Series=GH, Termination=Solder
LED1 LED2 LED3 LED4: library part "LED RGB SMD", "SMD Full-Color Top LED, WL-SFTW, Red & Green & Blue", Color="Red & Green & Blue", Manufacturer="Würth Elektronik eiSos GmbH", ComponentLink1Description=Manufacturer, ComponentLink1URL=http://www.we-online.de, ComponentLink2Description=Datasheet, ComponentLink2URL=http://katalog.we-online.com/led/datasheet/150141M173100.pdf, Created by="Christin Otto", Created Date="June 2013", partNo=150141M173100
LS1: library part CMP-103888-000003-1, "BUZZER MAGNETIC 3V 12MM TH", Frequency=2.3kHz, Max Operating Temperature=70°C, Max Supply Current=30mA, Max Supply Voltage (DC)=4V, Min Operating Temperature=-20°C, Min Supply Voltage (DC)=2V, Nominal Supply Voltage (DC)=3V, Contact Plating=Tin, Diameter=12mm, Height=7.5mm, Input Type=DC, Mount="Through Hole", Operating Supply Current=30mA, Packaging=Tray, Sensing Method=Magnetic, Series=AI, Termination="PC Pins", Voltage Rating=3V
Q1 Q2 Q3 Q4: library part CMP-83955-000006-1, "MOSFET N-CH 30V 5.7A SOT23", Case/Package=SOT-23, Continuous Drain Current (ID)=5.7A, Drain to Source Voltage (Vdss)=30V, Gate to Source Voltage (Vgs)=12V, Input Capacitance=630pF, Max Operating Temperature=150°C, Max Power Dissipation=1.4W, Min Operating Temperature=-55°C, Lead Free="Lead Free", Mount="Surface Mount", Number of Elements=1, Number of Pins=3, Packaging="Tape and Reel", Power Dissipation=1.4W, Radiation Hardening=No, Rds On Max=26.5mR
R1 R2 R3 R4 R5 R6 R7 R8 R9 R10 R11 R12 R13 R14 R15 R16 R17 R18 R23 R25 R27 R28 R31 R33 R39 R41 R44 R46 R47 R49 R50 R51 R52 R53 R54: library part CMP-2001-04268-1, Manufacturer="Vishay Dale", Part Number=CRCW08051K00FKTC
R19 R21 R24 R29 R30 R32 R34 R36 R37 R40 R42 R45: library part CMP-03412-000042-1, "Res Thin Film 0805 330K Ohm 1% 1/8W ±50ppm/°C Molded SMD SMD Paper T/R", Manufacturer=Yageo, Package=RT0805, Power Rating=0.125W, Resistance=330Ω, Temperature="-55°C to +155°C", Temperature Coefficient="50 ppm/°C", Temperature Range High=+155°C, Temperature Range Low=-55°C, Tolerance=0.0001, Voltage Rating=150V, Automotive=No, Category=Res, ComponentLink2Description=Datasheet, ComponentLink2URL=http://www.yageo.com/documents/recent/PYu-RT_1-to-0.01_RoHS_L_9.pdf, Composition="Thin Film", Device Class L1="Passive Components", Device Class L2=Resistors, Device Class L3="Chip SMD Resistors", Digikey Description="Res Thin Film 0805 330K Ohm 1% 1/8W ±50ppm/°C Molded SMD SMD Paper T/R", Footprint Url=http://www.yageo.com/exep/pages/download/literatures/PYu-R_Mount_10.pdf, Height=0.6mm, Ipc Land Pattern Name=RESC200125X50, Lead Free=Yes, Manufacturer Part Number=RT0805FRE07330RL, Mouser Description="Res Thin Film 0805 330K Ohm 1% 1/8W ±50ppm/°C Molded SMD SMD Paper T/R", Octopart=https://octopart.com/rt0805fre07330rl-yageo-39785396, RoHS=TRUE, Series=RT
R20 R22 R55 R56: library part CMP-2001-04268-1, "100K", Manufacturer="Vishay Dale", Part Number=CRCW08051K00FKTC
R26 R35 R38 R43 R48: library part CMP-2001-04268-1, "15K", Manufacturer="Vishay Dale", Part Number=CRCW08051K00FKTC
SW1 SW2 SW3 SW4: library part CMP-03913-161056523-3, "Tactile Sw, Spst-No, 0.05A, 16Vdc, 520Gf Rohs Compliant: Yes", Current Rating=50mA, Insulation Resistance=100MΩ, Manufacturer Lifecycle Status=ACTIVE, Max Operating Temperature=85°C, Min Operating Temperature=-40°C, Voltage Rating=16V, Contact Plating=Silver, Height=2.5mm, Lifecycle Status=Production, Packaging="Tape and Reel", RoHS=Compliant, YEOL="1 = Estimated lifetime > 10 years"
U3 U4: library part CMP-0188-00351-3, "IC ADC 10BIT SAR 16SOIC", Case/Package=SOIC, Max Operating Temperature=85°C, Max Supply Voltage=5.5V, Min Operating Temperature=-40°C, Min Supply Voltage=2.7V, Nominal Supply Current=425uA, Operating Supply Voltage=5V, Output Voltage=4.1V, Package Quantity=2600, Contact Plating=Tin, Conversion Rate=200KS/s, Differential Nonlinearity=1LSB, Full Scale Error=1LSB, Integral Nonlinearity (INL)=1LSB, Interface=SPI, Lead Free="Lead Free", Mount="Surface Mount", Number of A/D Converters=1, Number of Bits=10, Number of Channels=8, Number of Converters=1, Number of Elements=1, Number of Pins=16, Packaging="Tape and Reel", Polarity=Unipolar, Radiation Hardening=No, REACH SVHC="No SVHC", Resolution=10b, Sampling Rate=200KS/s, Signal to Noise Ratio (SNR)=200dB, Supply Type=Single
U6: library part CMP-209535-000002-1, "1A LOW DROPOUT VOLTAGE REGULATOR", RoHS Compliant=Yes

## Free pads (board coordinates)
  round 5 hole 3.2: 3(4.6,3.8) 3(4.6,75.4) 3(94.6,3.8) 3(94.6,75.4)

## Via types
v1: diameter 0.8, hole 0.4, Top Layer to Bottom Layer, tented both sides, 144 vias

## Nets (pads, with @x,y where several pads share a name; then routed paths per layer and width w, separated by ;. In a path a pad name is that pad's centre, name@x,y a point inside that pad or via, vN(x,y) a via of type N, cw(c..) or ccw(c..) an arc to the next point about the centre after c; other vN are vias at no path point)
3.3: "5V TO 3V3.4" C2.2 C3.2 C6.2 C7.2 J2.1 J3.1 J5.1 J6.1 J14.1 J15.1 J16.1 J17.1 J18.1 J20.4 R1.2 R2.2 R3.2 R4.2 R5.1 R6.2 R7.2 R8.2 R9.2 R10.1 R15.1 R16.1 R17.2 R18.1 R27.1 R28.1 R35.2 R38.1 R43.1 R48.1 R55.1 R56.1 U3.15 U3.16 U4.15 U4.16 | length 142.6
  Top Layer w0.3: v1(12.954,12.192) 13.589,12.827 R18.1@13.589,13.825 ; J14.1@24.859,9.144 25.959,9.144 26.416,8.687 v1(26.416,8.648)
  Top Layer w0.4: R17.2@13.589,20.465 13.607,20.447 v1(16.221,20.447) ; C7.2@87.617,33.401 87.617,34.531 87.884,34.798 88.285,34.798 88.519,35.032 88.519,39.116 89.027,39.624 v1(91.186,39.624) ; C2.2@89.027,50.419 89.027,44.713 R5.1@89.29,44.45 89.671,44.069 v1(91.059,44.069)
  Top Layer w0.5: v1(6.223,67.056) 6.239,67.072 9.324,67.072 J16.1@9.34,67.088 ; J17.1@9.368,20.768 9.52,20.617 13.438,20.617 R17.2@13.589,20.465 ; J18.1@23.689,69.626 23.689,70.72 24.089,71.12 v1(28.956,71.12) ; v1(34.163,72.39) 34.22,72.333 34.22,69.721 J15.1@34.315,69.626 ; C7.2@87.617,33.401 87.623,33.394 87.623,31.63 C6.2@87.63,31.623
  Bottom Layer w0.3: R55.1@9.906,10.55 10.033,10.55 10.508,11.025 10.508,12.016 10.684,12.192 v1(12.954,12.192) ; R48.1@20.193,13.698 23.223,13.698 25.019,15.494 v1(26.416,15.494) ; R4.2@64.117,14.097 64.117,12.464 v1(64.135,12.446)
  Bottom Layer w0.4: R35.2@20.193,22.116 20.193,24.13 ; R38.1@20.193,31.614 20.343,31.614 21.096,30.861 v1(24.638,30.861) ; R43.1@20.32,25.654 20.193,25.527 20.193,24.13 ; v1(21.209,24.003) 21.132,24.08 20.243,24.08 20.193,24.13 ; R1.2@33.891,14.351 34.316,14.776 34.316,15.793 34.925,16.402 v1(34.925,16.51) ; v1(70.866,16.383) 70.866,14.115 R3.2@70.884,14.097 ; J2.1@71.822,9.368 71.919,9.271 72.918,9.271 73.152,9.037 v1(73.152,2.921) ; U3.15@85.405,53.34 U3.16@85.405,54.61 v1(87.122,54.61) ; R10.1@89.154,21.844 89.154,20.447 v1(90.043,19.558)
  Bottom Layer w0.5: R16.1@4.826,61.976 4.763,62.039 4.763,64.706 R15.1@4.699,64.77 4.826,64.897 4.826,67.056 ; v1(6.223,67.056) 6.166,67.113 4.883,67.113 4.826,67.056 ; R28.1@13.716,72.018 5.724,72.018 4.826,71.12 4.826,67.056 ; J20.4@21.844,73.66 25.742,73.66 26.035,73.367 R27.1@26.035,71.637 28.312,71.637 28.702,71.247 28.748,71.247 28.875,71.12 v1(28.956,71.12) ; J5.1@34.385,69.527 34.455,69.457 34.455,64.586 R7.2@34.526,64.516 ; v1(40.132,12.954) 40.805,12.954 41.059,12.7 ; R2.2@40.903,14.351 41.059,14.195 41.059,12.7 ; J3.1@41.215,9.368 41.059,9.524 41.059,12.7 ; R6.2@41.538,64.516 41.538,62.65 41.831,62.357 42.083,62.357 42.21,62.23 v1(42.291,62.23) ; R56.1@49.53,68.444 51.523,68.444 51.816,68.151 v1(51.816,66.04) ; 66.293,51.433 68.833,51.433 ; v1(66.294,68.707) 67.967,68.707 68.367,69.107 J6.1@68.367,69.527 ; v1(68.453,60.833) R8.2@68.453,63.11 ; v1(71.12,60.706) R9.2@71.12,63.11 ; U4.15@85.532,32.131 U4.16@85.532,33.401 85.548,33.401 85.598,33.451 v1(85.598,34.544)
3V3_BUZZER: C9.1 C10.1 R47.2 U6.2 U6.4 | length 17.7
  Bottom Layer w0.3: C9.1@11.43,63.627 C10.1@13.843,63.627 ; U6.4@15.748,65.278 20.828,65.278 ; U6.2@22.338,65.278 20.828,65.278 ; R47.2@22.733,60.706 22.733,60.856 21.232,62.357 21.209,62.357 20.828,62.738 20.828,65.278
  Bottom Layer w0.5: C10.1@13.843,63.627 13.843,64.897 14.224,65.278 U6.4@15.748,65.278
+5: "5V TO 3V3.1" C1.2 C11.1 C12.1 C13.2 C14.2 H2.2 J1.2 J1.28 J4.1 J7.1 J8.1 J9.1 J10.1 J12.1 J13.1 LED1.1 LED2.1 LED3.1 LED4.1 R11.1 R12.1 R13.1 R14.1 R49.2 R50.2 R51.2 R52.2 R53.2 R54.2 U1.48 U2.43 U6.3 | length 460.7
  Top Layer w0.3: R52.2@16.637,38.49 16.637,39.497 ; R51.2@16.637,43.443 16.637,45.036 16.461,45.212 10.16,45.212 9.906,45.466 ; R50.2@16.637,48.65 16.637,49.735 16.461,49.911 15.367,49.911 14.947,50.331 10.024,50.331 9.906,50.214 ; R49.2@16.637,53.222 16.637,55.118 16.383,55.372 16.002,55.372 ; v1(18.034,63.627) 18.034,63.705 18.21,63.881 v1(22.352,63.881) ; LED2.1@22.712,47.762 22.412,47.762 22.112,48.062 22.112,49.144 21.633,49.622 21.633,50.812 22.133,51.312 22.133,51.334 22.433,51.634 LED1.1@22.733,51.634 22.733,57.15 22.098,57.785 16.178,57.785 16.002,57.609 16.002,55.372 ; LED3.1@22.733,43.76 22.433,43.76 22.133,43.46 22.133,43.438 21.633,42.938 21.633,41.748 21.991,41.39 22.663,41.39 23.102,40.951 23.102,40.074 22.886,39.858 LED4.1@22.886,38.68 21.836,38.68 21.019,39.497 16.637,39.497 ; v1(32.258,6.096) 32.258,8.433 C13.2@32.498,8.673 C14.2@34.29,8.673 ; C14.2@34.29,8.71 C14.2@34.29,8.673 ; C1.2@36.068,8.763 35.978,8.673 C14.2@34.29,8.673 ; R11.1@39.624,10.296 38.363,10.296 37.838,9.771 37.838,8.106 36.479,6.747 J12.1@36.479,5.069 34.682,5.069 34.29,5.461 C14.2@34.29,8.673 ; R12.1@42.291,10.296 42.441,10.296 42.916,10.771 42.916,10.921 42.926,10.931 42.926,11.43 43.434,11.938 46.482,11.938 46.609,12.065 46.687,12.065 46.863,12.241 46.863,14.859 47.064,15.06 48.334,15.06 U2.43@48.514,15.24 ; v1(61.341,13.081) 62.357,13.081 62.638,12.8 J7.1@62.638,9.144 ; 9.906,45.466 9.906,40.513 10.287,40.132 16.461,40.132 16.637,39.956 16.637,39.497 ; 9.906,45.466 9.906,50.214 ; 9.906,50.214 9.906,56.339 10.082,56.514 11.151,56.514 11.27,56.633 11.27,55.548 11.446,55.372 16.002,55.372
  Top Layer w0.4: v1(9.017,28.067) 9.017,23.983 9.387,23.613 11.27,23.613 11.323,23.56 11.323,22.459 11.431,22.351 11.557,22.225 v1(16.383,22.225) ; v1(61.341,13.081) 61.341,16.403 61.575,16.637 v1(66.548,16.637) ; v1(66.421,29.21) 68.726,29.21 68.98,28.956 v1(69.088,28.956)
  Top Layer w0.5: R11.1@39.624,10.296 R12.1@42.291,10.296 ; R14.1@56.243,64.516 53.633,64.516 53.34,64.809 53.34,72.732 53.633,73.025 63.08,73.025 63.373,72.732 63.373,69.651 J13.1@63.348,69.626 ; R13.1@63.137,64.516 63.242,64.622 63.242,69.521 J13.1@63.348,69.626 ; v1(78.105,17.399) 83.485,17.399 83.866,17.018 v1(83.947,17.018) ; v1(83.82,22.098) 83.82,29.464 84.455,30.099 91.274,30.099 91.567,30.392 91.567,33.489 91.86,33.782 93.342,33.782 J10.1@93.469,33.909 93.469,39.367 94.361,40.259 97.751,40.259 98.044,40.552 98.044,56.73 97.751,57.023 94.019,57.023 ; v1(84.074,13.589) 84.101,13.562 J8.1@84.101,9.144 ; J4.1@93.469,54.991 93.726,55.248 93.726,56.73 94.019,57.023 ; J13.1@63.348,69.626 73.106,69.626 J9.1@73.252,69.772 73.252,72.744 73.326,72.818 73.326,73.113 73.535,73.322 89.746,73.322 90.805,72.263 90.805,64.389 91.44,63.754 H2.2@93.98,63.754 93.98,57.062 94.019,57.023
  Bottom Layer w0.3: J1.2@11.27,56.633 11.27,59.768 11.446,59.944 16.08,59.944 16.256,60.12 16.256,63.451 16.432,63.627 v1(18.034,63.627) ; v1(22.352,63.881) 22.345,63.874 22.345,62.995 U6.3@22.338,62.988 23.778,62.988 24.211,63.421 C11.1@24.511,63.421 27.154,63.421 C12.1@27.178,63.397 ; U1.48@29.845,8.074 30.099,7.82 30.099,6.272 30.275,6.096 v1(32.258,6.096)
  Bottom Layer w0.4: v1(9.017,28.067) 9.017,56.134 9.516,56.633 J1.2@11.27,56.633 ; J1.28@11.27,23.613 8.766,23.613 R53.2@8.382,23.997 8.382,3.028 8.616,2.794 24.15,2.794 24.384,3.028 24.384,6.064 24.618,6.298 29.611,6.298 29.845,6.532 U1.48@29.845,8.074 ; v1(16.383,22.225) 16.383,22.333 16.637,22.587 R54.2@16.637,23.74 ; v1(66.421,29.21) 66.421,32.258 67.056,32.893 ; v1(66.548,16.637) 66.548,17.927 66.782,18.161 68.727,18.161 69.088,18.522 69.088,26.797 ; v1(69.088,28.956) 69.088,26.797 ; v1(78.105,17.399) 78.105,25.654 76.962,26.797 69.088,26.797
  Bottom Layer w0.5: U2.43@48.514,15.24 61.087,15.24 61.341,14.986 v1(61.341,13.081) ; 67.056,32.893 68.833,32.893 ; v1(83.82,22.098) 83.82,19.593 83.947,19.466 v1(83.947,17.018) 83.947,16.937 84.074,16.81 v1(84.074,13.589)
+5_SERVO: C4.2 C5.2 H1.2 J11.2 J11.5 J11.8 J11.11 J11.14 J11.17 J11.20 J11.23 | length 67.5
  Top Layer w0.5: C4.2@77.819,57.277 78.519,56.577 79.769,56.577 79.769,50.95 80.137,50.582 J11.23@80.137,50.292 J11.20@80.137,47.752 J11.17@80.137,45.212 J11.14@80.137,42.672 J11.11@80.137,40.132 J11.8@80.137,37.592 J11.5@80.137,35.052 J11.2@80.137,32.512 80.137,32.222 79.769,31.854 79.769,21.274 79.069,20.574 76.853,20.574 76.153,19.874 76.153,16.938 77.978,15.113 87.845,15.113 88.138,14.82 88.138,11.303 88.9,10.541 H1.2@93.98,10.541
+12: pad.3@94.6,75.4 R20.2 | length 7.2
  Bottom Layer w0.3: pad.3@94.473,74.946 95.265,74.154 97.423,74.154 98.044,73.533 98.044,70.884 R20.2@97.79,70.63
A1A: J10.2 U4.1 | length 5.9
  Bottom Layer w0.3: U4.1@90.932,33.401 91.382,33.401 92.094,32.689 94.789,32.689 J10.2@96.009,33.909
A1B: J4.2 U3.1 | length 6.1
  Bottom Layer w0.3: U3.1@90.805,54.61 91.255,54.61 92.144,53.721 94.739,53.721 J4.2@96.009,54.991
A2A: J10.3 U4.2 | length 2.9
  Bottom Layer w0.3: U4.2@90.932,32.131 92.364,32.131 93.126,31.369 J10.3@93.469,31.369
A2B: J4.3 U3.2 | length 3
  Bottom Layer w0.3: U3.2@90.805,53.34 90.932,53.213 92.317,53.213 93.079,52.451 J4.3@93.469,52.451
A3A: J10.4 U4.3 | length 5.9
  Bottom Layer w0.3: U4.3@90.932,30.861 92.252,30.861 92.964,30.149 94.789,30.149 J10.4@96.009,31.369
A3B: J4.4 U3.3 | length 6.1
  Bottom Layer w0.3: U3.3@90.805,52.07 92.125,52.07 92.964,51.231 94.789,51.231 J4.4@96.009,52.451
A4A: J10.5 U4.4 | length 2.9
  Bottom Layer w0.3: U4.4@90.932,29.591 92.364,29.591 93.126,28.829 J10.5@93.469,28.829
A4B: J4.5 U3.4 | length 3
  Bottom Layer w0.3: U3.4@90.805,50.8 92.491,50.8 93.38,49.911 J4.5@93.469,49.911
A5A: J10.6 U4.5 | length 5.9
  Bottom Layer w0.3: U4.5@90.932,28.321 92.252,28.321 92.964,27.609 94.789,27.609 J10.6@96.009,28.829
A5B: J4.6 U3.5 | length 6.1
  Bottom Layer w0.3: U3.5@90.805,49.53 92.125,49.53 92.964,48.691 94.789,48.691 J4.6@96.009,49.911
A6A: J10.7 U4.6 | length 2.9
  Bottom Layer w0.3: U4.6@90.932,27.051 92.364,27.051 93.126,26.289 J10.7@93.469,26.289
A6B: J4.7 U3.6 | length 3
  Bottom Layer w0.3: U3.6@90.805,48.26 92.491,48.26 93.38,47.371 J4.7@93.469,47.371
A7A: J10.8 U4.7 | length 5.9
  Bottom Layer w0.3: U4.7@90.932,25.781 92.252,25.781 92.964,25.069 94.789,25.069 J10.8@96.009,26.289
A7B: J4.8 U3.7 | length 6.1
  Bottom Layer w0.3: U3.7@90.805,46.99 92.125,46.99 92.964,46.151 94.789,46.151 J4.8@96.009,47.371
A8A: J10.9 U4.8 | length 2.9
  Bottom Layer w0.3: U4.8@90.932,24.511 92.364,24.511 93.126,23.749 J10.9@93.469,23.749
A8B: J4.9 U3.8 | length 3.3
  Bottom Layer w0.4: U3.8@90.805,45.72 91.254,45.72 91.354,45.62 91.354,45.171 91.694,44.831 J4.9@93.469,44.831
ADC_VBAT: R22.1 U1.33 | length 123
  Top Layer w0.4: v1(66.294,60.833) 67.691,62.23 v1(83.693,62.23)
  Bottom Layer w0.4: U1.33@29.845,45.574 30.715,44.704 35.326,44.704 35.56,44.47 35.56,24.765 36.41,23.915 40.946,23.915 41.205,24.174 64.179,24.174 64.474,24.469 64.474,59.013 v1(66.294,60.833) ; v1(83.693,62.23) 94.47,62.23 R22.1@95.74,60.96
BLDC_MOTOR_A: J11.3 U2.9 | length 3.9
  Top Layer w0.5: U2.9@73.914,33.02 76.962,33.02 77.47,32.512 J11.3@77.597,32.512
BLDC_MOTOR_B: J11.6 U2.10 | length 3.9
  Top Layer w0.5: U2.10@73.914,35.56 76.799,35.56 77.307,35.052 J11.6@77.597,35.052
BUZZER: LS1.2 Q4.3 | length 10.5
  Bottom Layer w0.3: Q4.3@17.838,57.277 17.838,59.064 18.328,59.554 25.04,59.554 25.443,59.958 25.443,60.378 LS1.2@25.644,60.579
CS_LINE_A: R5.2 U1.18 U3.10 | length 58.2
  Top Layer w0.3: v1(62.611,47.498) 63.106,47.003 71.452,47.003 71.628,47.179 71.628,51.894 71.804,52.07 v1(78.74,52.07) ; v1(83.185,52.197) 85.725,52.197 85.979,51.943 85.979,47.166 86.059,47.086 86.645,47.086 v1(86.741,46.99) 86.741,46.855 87.24,46.356 R5.2@87.24,44.45
  Bottom Layer w0.3: U1.18@45.085,50.574 45.285,50.574 46.109,49.75 62.264,49.75 62.611,49.403 v1(62.611,47.498) ; v1(78.74,52.07) 78.803,52.133 83.121,52.133 v1(83.185,52.197) ; U3.10@85.405,46.99 v1(86.741,46.99)
CS_LINE_B: R10.2 U1.10 U4.10 | length 52
  Top Layer w0.3: U1.10@45.085,30.574 45.495,30.984 45.495,31.319 45.927,31.75 63.754,31.75 64.223,31.281 70.7,31.281 v1(70.739,31.242)
  Bottom Layer w0.3: v1(70.739,31.242) 70.874,31.242 71.382,31.75 76.036,31.75 76.671,31.115 81.407,31.115 82.55,29.972 82.55,25.957 82.726,25.781 U4.10@85.532,25.781 87.073,25.781 87.249,25.605 87.249,21.989 R10.2@87.104,21.844
EN_AL: J1.3 J1.5 R49.1 | length 5.5
  Top Layer w0.3: J1.3@13.81,54.093 13.81,51.553 16.256,51.553 R49.1@16.637,51.172
EN_BL: J1.7 J1.9 R50.1 | length 5.4
  Top Layer w0.3: J1.7@13.81,49.013 13.81,46.473 16.51,46.473 R50.1@16.637,46.6
EN_CL: J1.15 J1.17 R52.1 | length 8
  Top Layer w0.3: J1.15@13.81,38.853 13.81,36.313 16.51,36.313 R52.1@16.637,36.44
  Bottom Layer w0.5: J1.17@13.81,36.313 J1.15@13.81,38.853
EN_DL: J1.11 J1.13 R51.1 | length 5.4
  Top Layer w0.3: J1.11@13.81,43.933 13.81,41.393 R51.1@16.637,41.393
ENA1: J3.2 R2.1 U1.2 | length 18.4
  Bottom Layer w0.5: R2.1@38.853,14.351 38.784,14.282 38.784,9.437 J3.2@38.715,9.368 38.715,6.516 39.008,6.223 42.633,6.223 42.926,6.516 42.926,10.281 43.219,10.574 U1.2@45.085,10.574
ENA2: J2.2 R3.1 U1.4 | length 40.8
  Bottom Layer w0.4: U1.4@45.085,15.574 45.285,15.574 46.764,14.095 46.764,6.303 46.998,6.068 69.088,6.068 69.322,6.303 J2.2@69.322,9.368
  Bottom Layer w0.5: R3.1@68.834,14.097 68.834,11.456 69.322,10.968 J2.2@69.322,9.368